# Altium PCB RGB_plate.PcbDoc
Units mm, origin at the board's own origin, x right, y up, seen from the top; angles counter-clockwise.
Board outline 5.59 x 13.97 mm, 2 copper layers (Top Layer, Bottom Layer); 1 components, 115 nets, 10 pads, 0 vias.
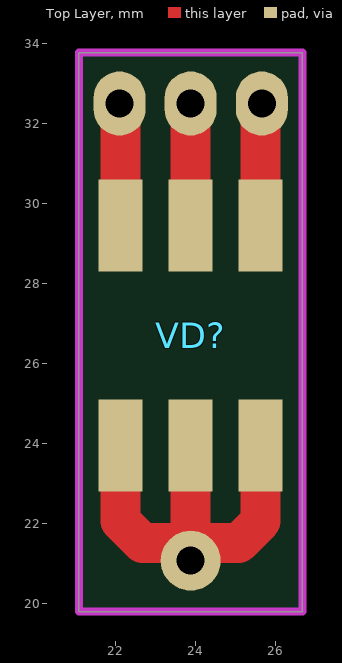
[diagram p0: Top Layer view]
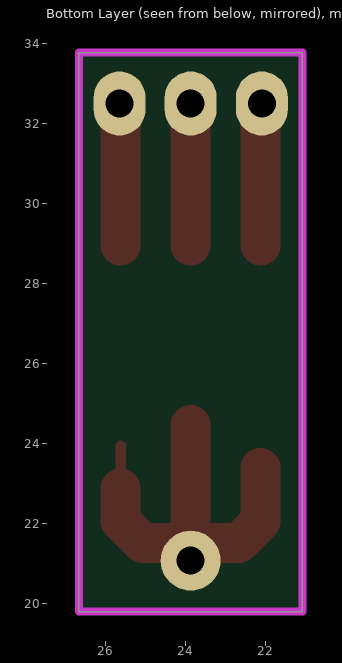
[diagram p1: Bottom Layer view, seen from below]

## Layer stack, top to bottom
Top Solder: solder mask 0.0102, Solder Resist, Dk 3.5
Top Layer: signal copper 0.0356
Dielectric 1: dielectric 0.32, FR-4, Dk 4.8
Bottom Layer: signal copper 0.0356
Bottom Solder: solder mask 0.0102, Solder Resist, Dk 3.5

## Board outline
21.082,19.812 26.67,19.812 26.67,33.782 21.082,33.782

## Design rules (kind name [scope] priority, off if disabled: settings)
Clearance [All] p1: gap=0.254 ignorepadtopadclearanceinfootprint=FALSE except(0: Arc-Hole Track-Hole SMDPad-Hole THPad-Hole Via-Hole Fill-Hole Poly-Hole Region-Hole Text-Hole)
PolygonConnect [All] p1: connectstyle=Relief reliefconductorwidth=0.254 reliefentries=4 polygonreliefangle="90 Angle" airgapwidth=0.254
RoutingVias [All] p1: holewidth=0.711 width=1.27 viastyle="Through Hole" minholewidth=0.711 minwidth=1.27 maxholewidth=0.711 maxwidth=1.27
SolderMaskExpansion [All] p1: expansion=0.102
Width [All] p1 off: maxlimit=0.254 minlimit=0.254 preferedwidth=0.254
30 further rules are at their usual default settings.

## Components (designator, comment, footprint, x,y, rotation, side; value= is the part's Value field where it differs from the comment)
VD? "*" smd_5050 21.576,22.814 r90 top

## Footprints (in the part's own frame and the unit in brackets; to place one, negate y for a bottom-side part, rotate by r counter-clockwise, add the part's x,y. Pads: shape width x height; smd on the part's side, far side on the other; paste and mask are expansions set on the pad)
smd_5050 [mm]
  rect 2.3x1.1 smd: 1(1.15,-4.05) 2(1.15,-2.3) 3(1.15,-0.55) 4(6.65,-0.55) 5(6.65,-2.3) 6(6.65,-4.05)

## Part data
VD?: library part LED

## Free pads (board coordinates)
  oval 1.3x1.6 hole 0.7: 7(22.098,32.512) 30(23.876,32.512) 31(25.654,32.512)
  round 1.5 hole 0.7: 32(23.876,21.082)

## Nets (pads, with @x,y where several pads share a name; then routed paths per layer and width w, separated by ;. In a path a pad name is that pad's centre, name@x,y a point inside that pad or via, vN(x,y) a via of type N, cw(c..) or ccw(c..) an arc to the next point about the centre after c; other vN are vias at no path point)
"9Â AC": 
"12Â AC": 
+5Â: pad.7 VD?.4 | length 3.6
  Top Layer w0.254: pad.7 pad.7@22.126,32.484
  Top Layer w1: VD?.4@22.126,28.956 VD?.4 pad.7@22.126,32.484
+12Â: pad.30 VD?.5 | length 3.6
  Top Layer w1: VD?.5@23.876,28.956 VD?.5 pad.30
+180Â: pad.31 VD?.6 | length 3.6
  Top Layer w0.254: pad.31@25.626,32.484 pad.31
  Top Layer w1: VD?.6@25.626,28.956 VD?.6 pad.31@25.626,32.484
DHT11_PB4: 
DIG0: 
DIG1: 
DIG2: 
DIG3: 
DIG4: 
DIG5: 
DIG6: 
DIG7: 
DIG8: 
DIG9: 
GND: pad.32 VD?.1 VD?.2 VD?.3 | length 10.3
  Top Layer w0.254: VD?.1@25.626,22.888 25.626,23.396 VD?.1
  Top Layer w1: VD?.3@22.126,23.396 22.126,22.07 22.677,21.519 pad.32@23.439,21.519 ; VD?.2@23.876,24.472 VD?.2 pad.32 24.313,21.519 25.075,21.519 25.626,22.07 VD?.1@25.626,22.888
IN1: 
IN2: 
IN3: 
IN4: 
L1: 
L2: 
L3: 
L4: 
L5: 
L6: 
L7: 
L8: 
L9: 
L10: 
NetC5_1: 
NetC12_1: 
NetC15_2: 
NetC16_1: 
NetD1_1: 
NetD1_2: 
NetD1_3: 
NetD1_4: 
NetD1_5: 
NetD1_6: 
NetD1_7: 
NetD1_8: 
NetD1_9: 
NetD1_10: 
NetD1_11: 
NetD1_12: 
NetD2_1: 
NetD2_3: 
NetD2_4: 
NetD2_5: 
NetD3_1: 
NetD3_2: 
NetDD1_1: 
NetDD1_3: 
NetDD1_8: 
NetDD2_3: 
NetDD2_4: 
NetDD2_6: 
NetDD2_7: 
NetDD4_7: 
NetHG1_11: 
NetHG2_11: 
NetHG3_11: 
NetHG4_11: 
NetHG5_2: 
NetK1_2: 
NetK1_3: 
NetK1_4: 
NetQ1_2: 
NetQ2_2: 
NetQ3_2: 
NetQ4_2: 
NetQ5_2: 
NetQ5_3: 
NetQ6_2: 
NetQ6_3: 
NetQ7_2: 
NetQ7_3: 
NetQ8_2: 
NetQ8_3: 
NetR1_1: 
NetR1_2: 
NetR2_1: 
NetR2_2: 
NetR3_1: 
NetR3_2: 
NetR4_1: 
NetR4_2: 
NetR5_2: 
NetR6_2: 
NetR7_2: 
NetR8_2: 
NetR9_2: 
NetR10_2: 
NetR11_2: 
NetR12_2: 
NetR13_1: 
NetR13_2: 
NetR14_2: 
PB3: 
PB5: 
PC0: 
PC1: 
PC2: 
PC3: 
RGB1: 
RGB2: 
RGB3: 
RTC_SCL: 
RTC_SDA: 
VCC: 
XTAL1: 
XTAL2: 
ÈÍÑ-1: 

## Keep-outs
Keep-Out Layer:
  lines w0.2: 21.082,19.812 23.876,19.812 26.67,19.812 26.67,33.782 21.082,33.782 21.082,19.812